# Altium PCB Power.PcbDoc
Units mil, origin at the board's own origin, x right, y up, seen from the top; angles counter-clockwise.
Board outline 1890 x 1205 mil, 2 copper layers (Top Layer, Bottom Layer); 13 components, 7 nets, 33 pads, 4 vias.
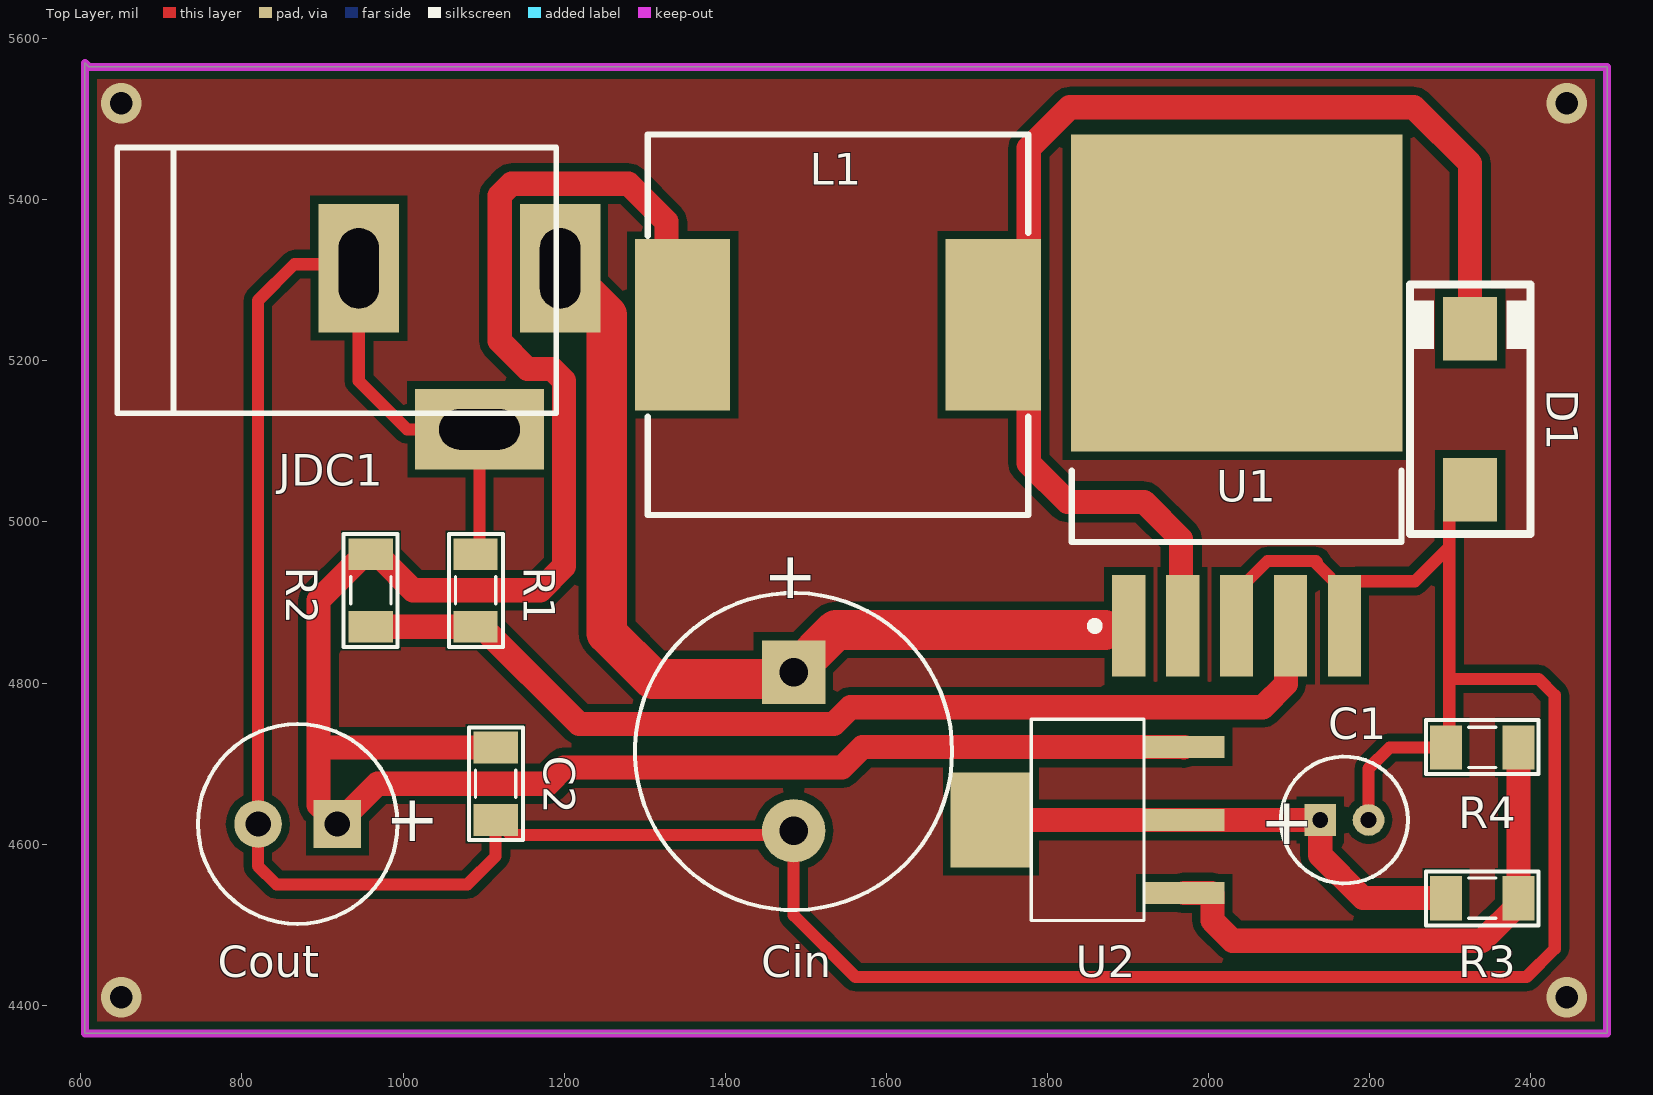
[diagram p0: Top Layer view]
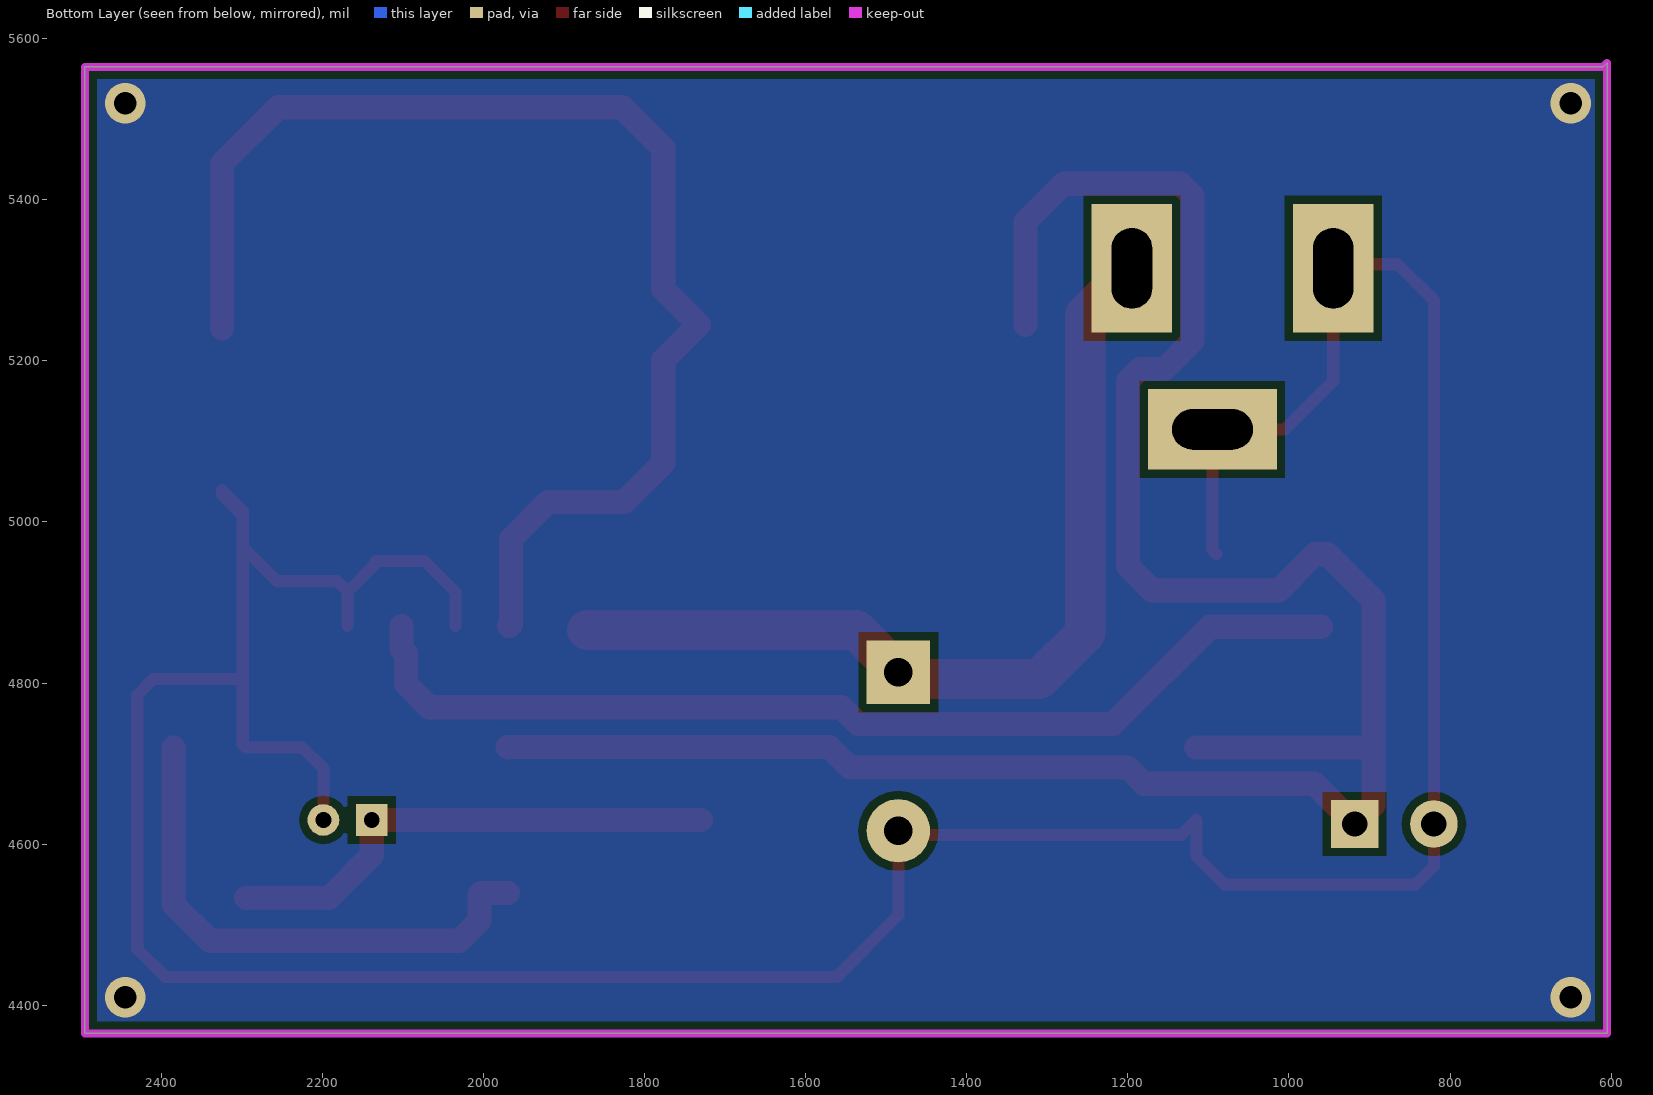
[diagram p1: Bottom Layer view, seen from below]
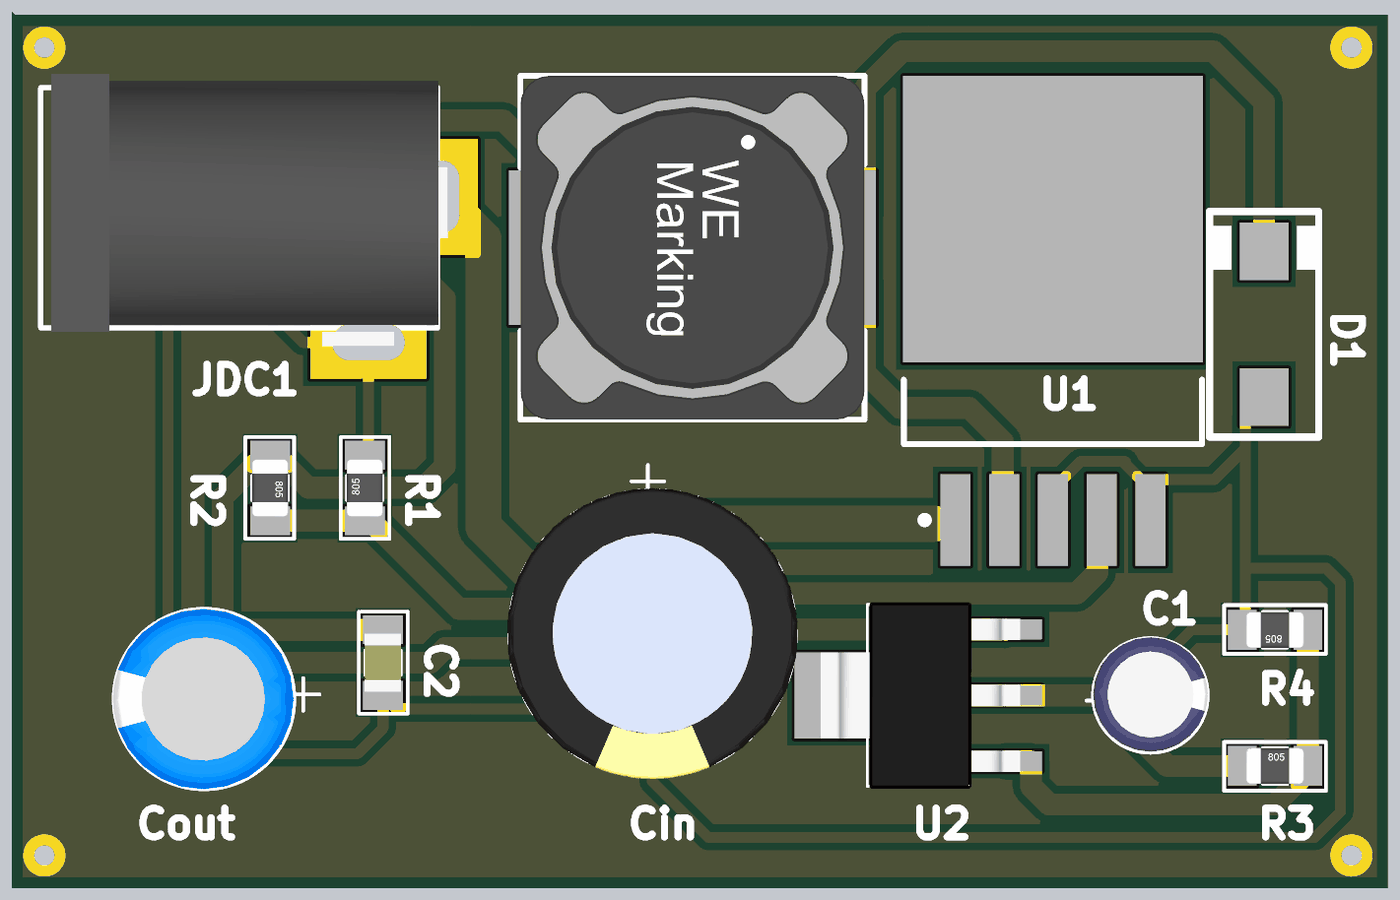
[diagram p2: 3D render of the assembled board from above, using the file's embedded part models]

## Layer stack, top to bottom
Top Solder: solder mask 0.4, Solder Resist, Dk 3.5
Top Layer: signal copper 1.4
Dielectric 1: dielectric 12.6, FR-4, Dk 4.8
Bottom Layer: signal copper 1.4
Bottom Solder: solder mask 0.4, Solder Resist, Dk 3.5

## Board outline
605,4365 2495,4365 2495,5565 610,5565 605,5570

## Design rules (kind name [scope] priority, off if disabled: settings)
Clearance [All] p1: gap=10 ignorepadtopadclearanceinfootprint=FALSE
PolygonConnect [All] p1: connectstyle=Relief reliefconductorwidth=10 reliefentries=4 polygonreliefangle="90 Angle" airgapwidth=10
RoutingVias [All] p1: holewidth=28 width=50 viastyle="Through Hole" minholewidth=28 minwidth=50 maxholewidth=28 maxwidth=50
SolderMaskExpansion [All] p1: expansion=4
Width [All] p1: maxlimit=50 minlimit=15 preferedwidth=30
30 further rules are at their usual default settings.

## Classes and differential pairs
component class Power: C1 C2 Cin D1 L1 R1 R2 R4 U2

## Components (designator, comment, footprint, x,y, rotation, side; value= is the part's Value field where it differs from the comment)
C1 "22uF/16V" CA-ALU-4 2168.86,4630 r0 top value=104
C2 "10uF" CAP_0805 1115,4675 r90 top value=33p
Cin "680uF/35V" CA-ALU-10 1485,4715 r270 top value=104
Cout "220uF/16V" CA-ALU-6.3 869.21,4625 r180 top value=104
D1 "1N5819" SMA 2325,5140 r90 top value=1N5007
JDC1 "Jac DC" DC-IN 1070,5215 r0 top
L1 "22uH" L-SMD-M-12x10 1540,5245 r270 top value="150 mH"
R1 "390" RES-SMD-0805 1090,4915 r90 top
R2 "1k2" RES-SMD-0805 960,4915 r270 top
R3 "510" RES-SMD-0805 2340,4532.97 r0 top
R4 "820" RES-SMD-0805 2340,4720 r180 top
U1 "LM2596" TO-263 2035,5107.14 r90 top
U2 "LM1117" LM1117-SOP 1920,4630 r90 top

## Footprints (in the part's own frame and the unit in brackets; to place one, negate y for a bottom-side part, rotate by r counter-clockwise, add the part's x,y. Pads: shape width x height; smd on the part's side, far side on the other; paste and mask are expansions set on the pad)
CA-ALU-4 [mm] "Polarized capacitors, Aluminum Electrolytic Capacitors, 2-Leads, Body 5x11x2x0.5"
  rect 1x1 hole 0.5: 1(-0.762,0)
  round 1 hole 0.5: 2(0.762,0)
  silkscreen extent -2,-2 2,2, body extent -2,-1.97 2,2.03, height 7.5
CA-ALU-6.3 [mm] "Polarized capacitors, Aluminum Electrolytic Capacitors, 2-Leads, Body 6.3x15x2.5x0.5"
  rect 1.5x1.5 hole 0.8: 1(-1.25,0)
  round 1.5 hole 0.8: 2(1.25,0)
  silkscreen extent -3.15,-3.15 3.15,3.15, body extent -3.12,-3.15 3.18,3.15, height 11
CA-ALU-10 [mm] "Polarized capacitors, Aluminum Electrolytic Capacitors, 2-Leads, Body 10x20x5x0.6"
  rect 2x2 hole 0.9: 1(-2.5,0)
  round 2 hole 0.9: 2(2.5,0)
  silkscreen extent -5,-5 5,5, body extent -5.08,-5.08 5.08,5.08, height 20.52
CAP_0805 [mil]
  rect 39.37x55 smd: 1(-45,0) 2(45,0)
  silkscreen extent -70,-34 70,33, body extent -40,-25 40,25, height 24
DC-IN [mil] "Jac DC input"
  rect 100x160 hole 50 slot 100 at 90 deg: 1(125,100) 2(-125,100)
  rect 160x100 hole 50 slot 100 at 0 deg: 3(25,-100)
  silkscreen extent -425,-80 120,250, body extent -410,-105 134,269, height 434
L-SMD-M-12x10 [mm] "WE-PDA SMD Shielded Power Inductor, 1210"
  rect 5.4x3 smd: 1(0,4.9) 2(0,-4.9)
  silkscreen extent -6,-6 6,6, body extent -6,-6 6,6, height 9.7
LM1117-SOP [mm]
  rect 0.7x2.54 smd: 1(-2.3,-1.27) 2(0,-1.27) 3(2.3,-1.27)
  rect 3x2.54 smd: 2(0,4.826)
  silkscreen extent -3.18,0 3.17,3.56, body extent -3.25,-1.78 3.25,5.18, height 1.68
RES-SMD-0805 [mil]
  rect 39.37x55 smd: 1(-45,0) 2(45,0)
  silkscreen extent -70,-34 70,33, body extent -39,-25 39,25, height 31
SMA [mm]
  rect 2x1.7 smd: 1(-2.544,0) 2(2.544,0)
  silkscreen extent -3.94,-1.9 3.94,1.9, body extent -2.87,-1.4 2.87,1.4, height 2.29
TO-263 [mm]
  rect 3.2x1.05 smd: 1(-6,3.4) 2(-6,1.7) 3(-6,0) 4(-6,-1.7) 5(-6,-3.4)
  rect 10x10.45 smd: 6(4.5,0)
  silkscreen extent -6.12,-5.2 -1.1,5.2, body extent -6.58,-5.2 7.57,5.2, height 4.65

## Part data
C1 Cin Cout: library part CAP-ALU-DIP, "Capacitor (Semiconductor SIM Model)", LatestRevisionDate=17-Jul-2002, LatestRevisionNote="Re-released for DXP Platform.", PackageReference=C1206, Publisher="Altium Limited"
C2: library part CapSMD, "Capacitor", LatestRevisionDate=17-Jul-2002, LatestRevisionNote="Re-released for DXP Platform.", PackageReference=RAD-0.3, Published=8-Jun-2000, Publisher="Altium Limited"
D1: library part Diode, "Default Diode", Code - JEDEC=DO-214-AB, Published=8-Jun-2000, Publisher="Altium Limited", Revision="July-2002: Re-released for DXP Platform."
JDC1: library part DCIN, "Jac DC input"
L1: library part Inductor, "Inductor"
R1 R2 R3 R4: library part "Resistor - SMD", "Resistor SMD", Manufacturer="Generic Components", Class=Passive, Published=08/06/2000, Publisher="Altium Hobart Technology Centre"
U1: Max Input Voltage="12 V", Max Output Current="3 (6.0 peak) A", Max Output Voltage=mV, Temperature Range="-40 to +125 degC", Category=IC-Power, Min Input Voltage=mV, Min Output Voltage=mV, Mounting Technology="Surface Mount", Status=Unreleased, Supply Voltage=mV
U2: library part LM1117-ADJ, "800mA Low-Dropout Linear Regulator", Creator="Nguyen Ba Bien", Website=http://group3i.net

## Via types
v1: diameter 50, hole 28, Top Layer to Bottom Layer, 4 vias

## Nets (pads, with @x,y where several pads share a name; then routed paths per layer and width w, separated by ;. In a path a pad name is that pad's centre, name@x,y a point inside that pad or via, vN(x,y) a via of type N, cw(c..) or ccw(c..) an arc to the next point about the centre after c; other vN are vias at no path point)
+3.3: C1.1 R3.1 U2.2 | length 630.9
  Top Layer w30: U2.2@1730,4630 1970,4630 C1.1 2138.86,4586.14 2192.03,4532.97 R3.1
+5: C2.2 Cout.1 L1.2 R2.1 U2.3 | length 2832.7
  Top Layer w30: C2.2 900,4720 895,4725 ; L1.2@1327.09,5245 1327.09,5372.91 1280,5420 1134.64,5420 1120,5405.36 1120,5224.64 1154.64,5190 1185.36,5190 1200,5175.36 1200,4945 1170.31,4915.31 1012.5,4915.31 972.5,4955.32 967.81,4960 R2.1 952.19,4960 895,4902.82 895,4725 ; U2.3 1969.45,4720 1968.9,4720.55 1570.55,4720.55 1545,4695 1200,4695 1180,4675 968.43,4675 Cout.1 895,4648.43 895,4725
+12: Cin.1 JDC1.1 U1.1 | length 1144
  Top Layer w50: JDC1.1 1253.03,5256.97 1253.03,4861.97 1310,4805 1476.57,4805 Cin.1 1537.5,4865.92 1871.14,4865.92
GND: C1.2 C2.1 Cin.2 Cout.2 D1.1 JDC1.2 JDC1.3 R1.2 R4.2 U1.3 U1.5 | length 4561.5
  Top Layer w15: JDC1.3@1087.5,5122.5 JDC1.3 ; R1.2 1095,4965 JDC1.3 ; U1.3 2035,4913.24 2073.17,4951.41 2133.59,4951.41 2135,4950 2135,4947.1 U1.5@2168.86,4913.24 ; U1.5 U1.5@2168.86,4913.24 ; C1.2 2198.86,4693.86 2225,4720 R4.2 2299.04,4724.03 2299.04,4805 ; JDC1.3 1005,5115 945,5175 JDC1.2 940,5320 865,5320 820,5275 Cout.2 820,4572.64 842.64,4550 1080,4550 1115,4585 C2.1 1133.42,4611.57 1473.43,4611.57 1485,4600 1485,4511.71 1561.71,4435 2395,4435 2430,4470 2430,4785 2410,4805 2299.04,4805 ; U1.5@2168.86,4913.24 2182.03,4926.41 2256.41,4926.41 2299.04,4969.04 ; 2299.04,4805 2299.04,4969.04 ; 2299.04,4969.04 D1.1@2299.04,5007.97 ; D1.1@2299.04,5007.97 2299.04,5013.88 D1.1 2325,5033.94 D1.1@2299.04,5007.97
NetD1_2: D1.2 L1.1 U1.2 | length 1567.5
  Top Layer w30: U1.2 1966.09,4872.91 1966.09,4978.91 1920,5025 1825,5025 1776.97,5073.03 1776.97,5200.94 L1.1 1776.97,5289.06 1776.97,5464.19 1827.78,5515 2255,5515 2325,5445 D1.2
NetR1_1: R1.1 R2.2 U1.4 | length 1281.4
  Top Layer w30: R2.2 R1.1 1097.81,4870 1218.76,4749.06 1534.73,4749.06 1555.67,4770 2067.43,4770 2096.26,4798.83 2096.26,4836.97 2101.93,4842.64 U1.4
NetR3_2: R3.2 R4.1 U2.1 | length 672.6
  Top Layer w30: U2.1 2003.78,4539.45 2005,4538.23 2005,4505 2030,4480 2339.84,4480 2385,4525.16 R3.2 R4.1
pads on no net: U1.6
copper on no net:
  other v1: 650,4410 2445,4410 650,5520 2445,5520

## Polygon pours and split planes (outlines as drawn)
no net on Drill Drawing (solid): 3260,4900
no net on Drill Drawing (solid): 2985,4885
no net on Bottom Layer (solid, pour order 18): 605,5565 2495,5565 2495,4365 605,4365
no net on Bottom Layer "Bottom Layer-No Net" (solid, pour order 2): 1675,5260
no net on Top Layer (solid, pour order 16): 605,4365 2495,4365 2495,5565 610,5565 605,5570

## Keep-outs
Keep-Out Layer:
  lines w10: 605,4365 605,5560 605,5570 610,5565 635,5565 2495,5565 2495,4365 605,4365

## Dimensions
2940,3759.99 to 605,4365 on Mechanical 15
605,4365 to 605,4365 on Mechanical 15

## Text inside footprints (layer, text, board x,y; h text height)
C1: Top Overlay "+" at 2063.86,4600 h59.06
Cin: Top Overlay "+" at 1455.98,4964.02 h59.06 r270
Cout: Top Overlay "+" at 1045.39,4654.02 h59.06 r180